# EAGLE board 32IV 7 Group and moisture (EAGLE 9.7.0)

Size 197.15 x 136.52 mm. Coordinates in mm from the lower left corner, seen from the top.
Outline: 0,0 197.15,0 197.15,136.52 0,136.52 0,0
Copper layers (1*16): Top 0.035mm / dielectric 1.5mm / Bottom 0.035mm
Design rules "default": minimum track width 6mil, minimum drill 0.35mm, track to track 6mil, track to pad 6mil, pad to pad 6mil, via to via 6mil, smd to smd 6mil, copper to edge 40mil, drill to drill 6mil, minimum pad ring 10mil, minimum via ring 8mil, stop-mask expansion 4mil, vias tented up to drill 0mil, thermal gap 10mil

## Footprints (pad centres in the part's own frame; a part is rotated, then mirrored left to right if it is on the bottom)
MQ-XX-SOCKET = drill 1.27: 1 -6.223,6.223; 2 -8.788,0; 3 -6.223,-6.223; 4 6.223,-6.223; 5 8.788,0; 6 6.223,6.223
28015 = drill 1.016 long: 1 -2.54,0; 2 0,0; 3 2.54,0
28027 = drill 1.016 long: 1 -2.54,0; 2 0,0; 3 2.54,0
GL5528 = drill 0.8 pad 1.4: 1 -1.702,0; 2 1.702,0
RESAD1016W63L850D250B = drill 0.83 pad 1.43: 1 -5.08,0; 2 5.08,0
SEN-13322 = drill 1.016 long: 1 -2.54,0; 2 0,0; 3 2.54,0
ARDUINO-UNO-R3-SHIELD = drill 1.016 pad 1.88: 3.3V 24.13,-2.54; 5V 24.13,0; A0 24.13,12.7; A1 24.13,15.24; A2 24.13,17.78; A3 24.13,20.32; A4 24.13,22.86; A5 24.13,25.4; AREF -24.13,-13.97; D2 -24.13,20.32; D3 -24.13,17.78; D4 -24.13,15.24; D5 -24.13,12.7; D6 -24.13,10.16; D7 -24.13,7.62; D8 -24.13,3.81; D9 -24.13,1.27; D10 -24.13,-1.27; D11 -24.13,-3.81; D12 -24.13,-6.35; D13 -24.13,-8.89; GND@0 24.13,2.54; GND@1 24.13,5.08; GND@2 -24.13,-11.43; IOREF 24.13,-7.62; NC 24.13,-10.16; RES 24.13,-5.08; RX -24.13,25.4; SCL -24.13,-19.05; SDA -24.13,-16.51; TX -24.13,22.86; VIN 24.13,7.62
TO92 = drill 0.813 octagon: 1 -1.27,0; 2 0,1.905; 3 1.27,0

## Placement (x,y rotation side)
GAS1  GAS-SENSORMQ-XX-SOCKET  [MQ-XX-SOCKET]  182.93,41.25 270 top
PING1  DISTANCE-SENSOR-3PIN  [28015]  147.37,32.36 0 top
PIR1  PIR-SENSOR_28027  [28027]  116.89,70.46 0 top
R1  PHOTOCELL_GL5528  [GL5528]  82.6,29.82 0 top
R2  1k  [RESAD1016W63L850D250B]  81.33,24.74 90 top
R3  1k  [RESAD1016W63L850D250B]  177.85,60.3 90 top
SEN1  SEN-13322  [SEN-13322]  54.63,7.62 0 top
U1  ARDUINO-UNO-R3-SHIELD  [ARDUINO-UNO-R3-SHIELD]  47.88,106.67 270 top
U2  TMP36GT9Z_TO92  [TO92]  66.09,29.82 0 top

## Library data of the parts
GAS1 PING1 PIR1 R1-R3 SEN1 U1 U2 = Tinkercad

## Nets
U1_5V: GAS1.4 GAS1.5 GAS1.6 PING1.2 PIR1.2 R1.2 SEN1.1 U1.5V U2.3
U1_A0: SEN1.3 U1.A0
U1_A1: GAS1.1 GAS1.3 R3.1 U1.A1
U1_A2: PING1.3 U1.A2
U1_A3: R1.1 R2.2 U1.A3
U1_A4: PIR1.1 U1.A4
U1_A5: U1.A5 U2.2
U1_GND: GAS1.2 PING1.1 PIR1.3 R2.1 R3.2 SEN1.2 U1.GND@0 U1.GND@1 U1.GND@2 U2.1

## Tracks (layer width: path | path; a pad name or v marks a point on that pad's centre or on a via)
U1_5V  (8 unrouted)
U1_A0  (1 unrouted)
U1_A1  (3 unrouted)
U1_A2  (1 unrouted)
U1_A3  (2 unrouted)
U1_A4  (1 unrouted)
U1_A5  (1 unrouted)
U1_GND  (9 unrouted)